# Altium PCB FFT_Device.PcbDoc
Units mm, origin at the board's own origin, x right, y up, seen from the top; angles counter-clockwise.
Board outline 127.36 x 101.63 mm, 2 copper layers (Top Layer, Bottom Layer); 86 components, 96 nets, 384 pads, 101 vias.
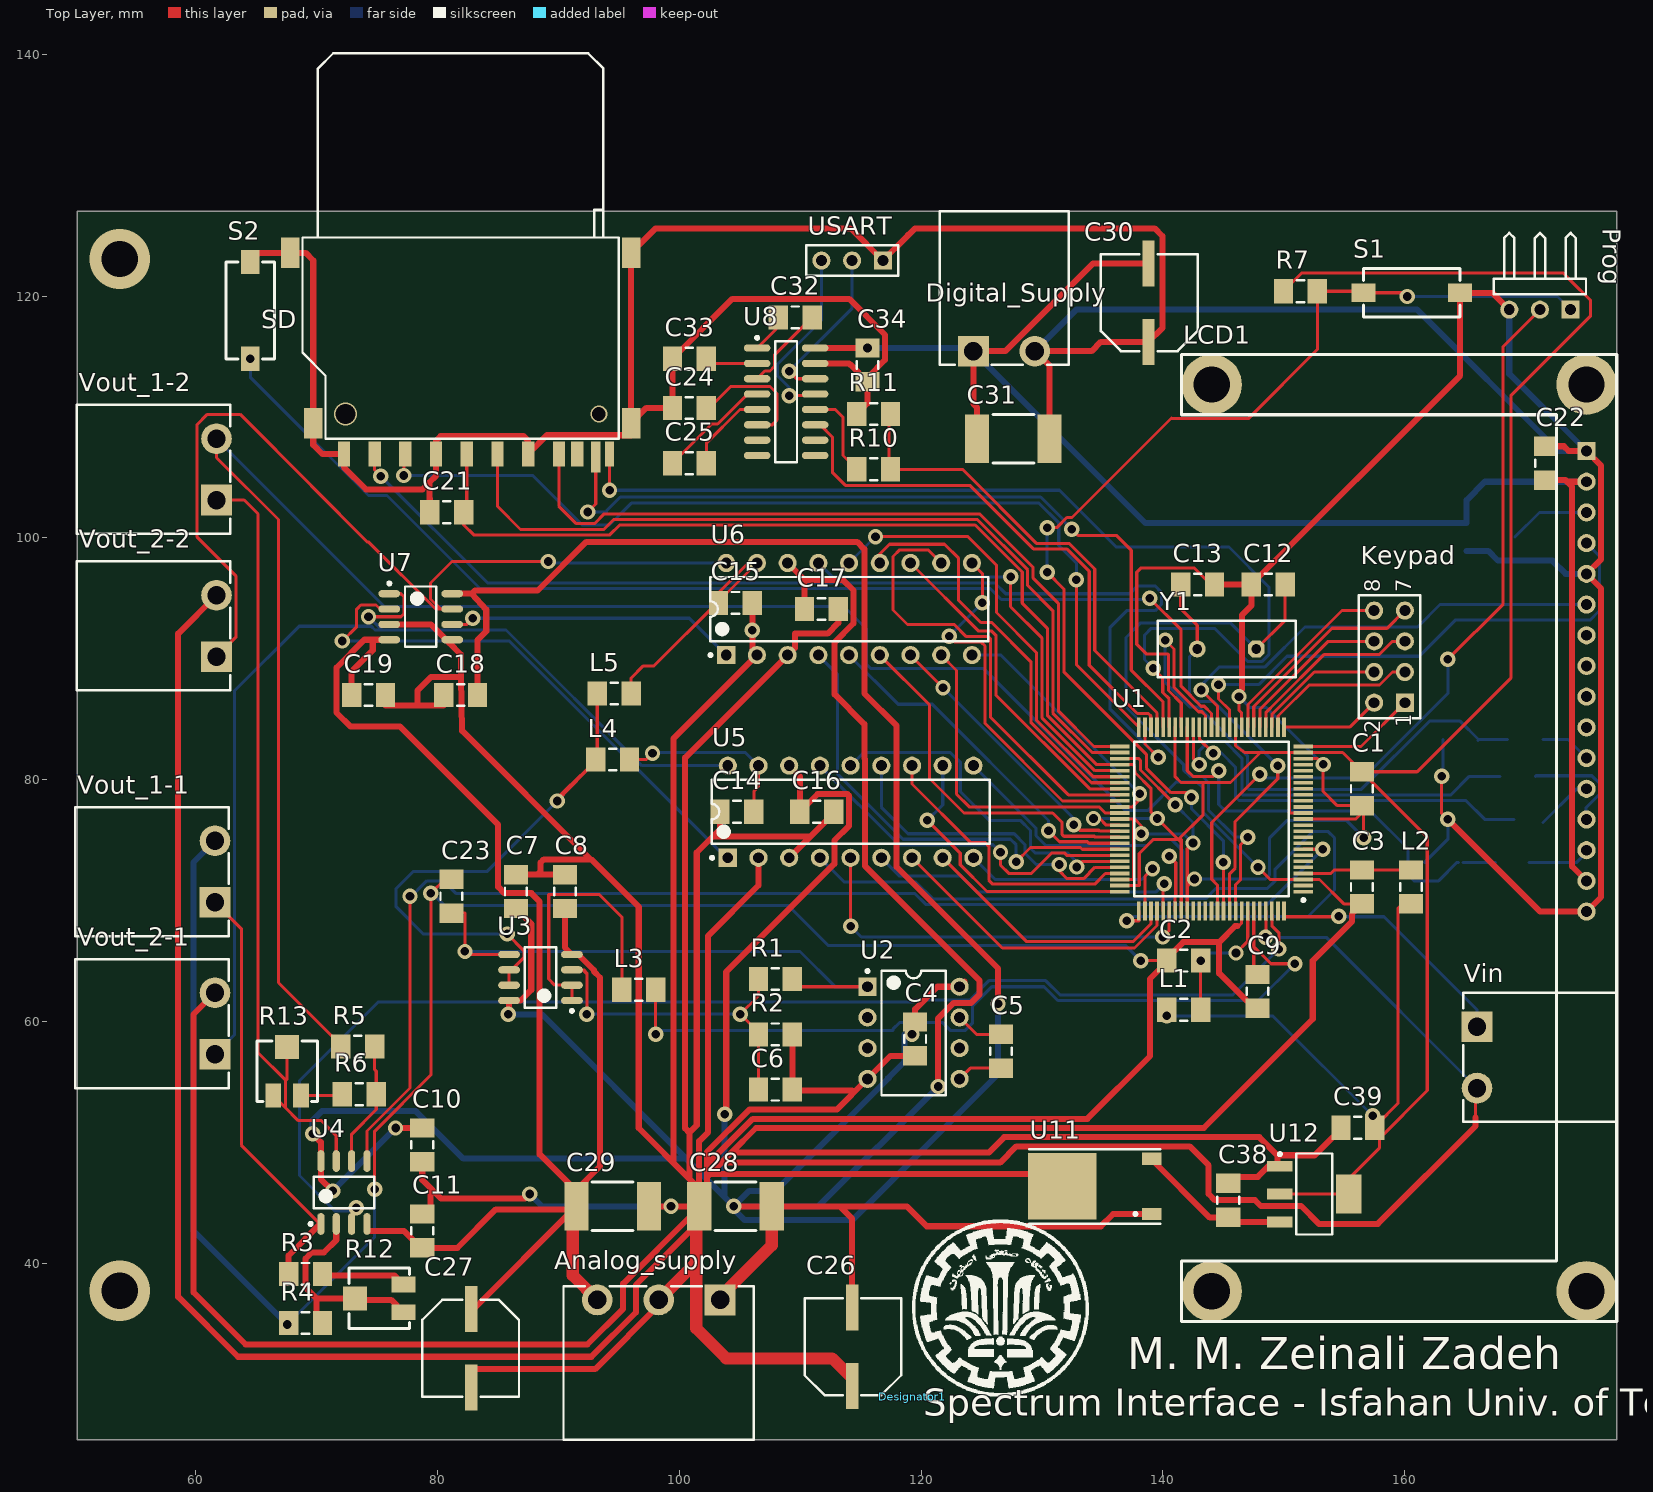
[diagram p0: Top Layer view]
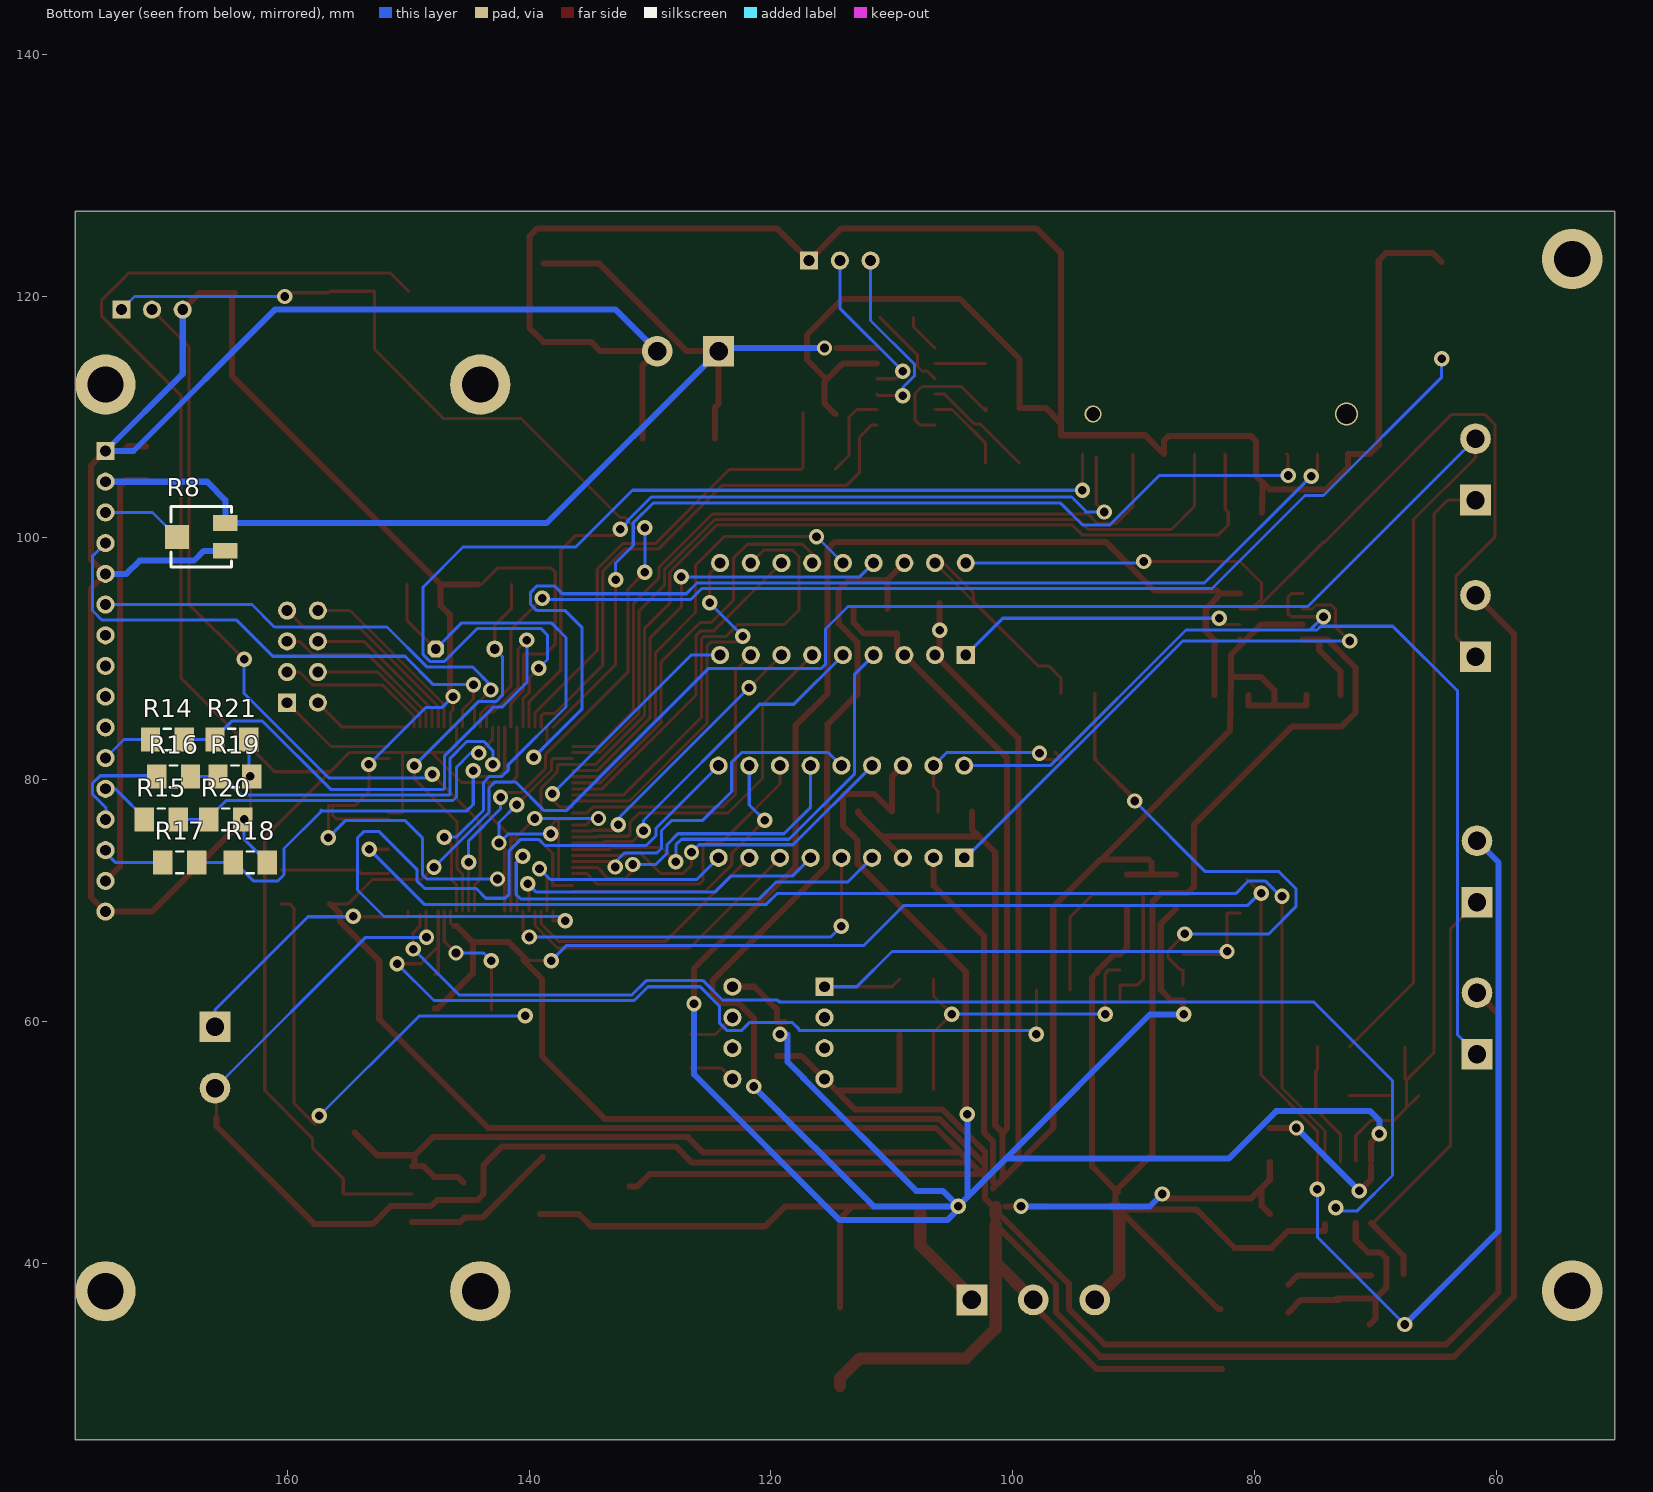
[diagram p1: Bottom Layer view, seen from below]

## Layer stack, top to bottom
Top Layer: signal copper 0.0356
Dielectric: dielectric 0.32, FR-4, Dk 4.8
Bottom Layer: signal copper 0.0356

## Board outline
106.096,25.375 50.19,25.375 50.19,126.898 50.19,127 147.422,127 177.546,127 177.546,36.678 177.546,25.375 106.121,25.375

## Design rules (kind name [scope] priority, off if disabled: settings)
Clearance [All] p1: gap=0.2
ComponentClearance [All] p1: gap=0 collisioncheckmode=3 verticalgap=0 showdistances=FALSE
HoleSize [All] p1: absolutevalues=TRUE maxlimit=3 minlimit=0.025 maxpercent=80.000 minpercent=20.000
MinimumSolderMaskSliver [All] p1: minsoldermaskwidth=0
PolygonConnect [All] p1: connectstyle=Relief reliefconductorwidth=0.254 reliefentries=4 polygonreliefangle="90 Angle"
RoutingTopology RoutingTopology_Starburst [(InNet('-15V_SRC') OR InNet('+3V3_SRC') OR InNet('+15V_SRC') OR InNet('GND_IN') OR InNet('VREF1') OR InNet('VREF2') OR InNet('VREF3') OR InNet('VREF4') OR InNet('VREF_UNBUF'))] p1: topology=Starburst
RoutingTopology RoutingTopology_Generic [All] p2: topology=Shortest
RoutingVias [All] p1: holewidth=0.711 width=1.27 viastyle="Through Hole" minholewidth=0.711 minwidth=1.27 maxholewidth=0.711 maxwidth=1.27
SilkToSilkClearance [All] p1: silktosilkclearance=0
SilkscreenOverComponentPads [All] p1: minsilkscreentomaskgap=0
SolderMaskExpansion [All] p1: expansion=0.102
Width Width_Generic [All] p1: maxlimit=1 minlimit=0.254 preferedwidth=0.254
22 further rules are at their usual default settings.

## Components (designator, comment, footprint, x,y, rotation, side; value= is the part's Value field where it differs from the comment)
Analog_supply "3-Pin Terrminal" "3-pin Terminal" 90.424,38.1 r0 top
C1 "Cap Semi" MELF-R3216-1206 156.464,79.248 r270 top
C2 "Cap Semi" MELF-R3216-1206 141.732,65.024 r0 top
C3 "Cap Semi" MELF-R3216-1206 156.464,71.12 r90 top
C4 "Cap Semi" MELF-R3216-1206 119.507,58.547 r90 top
C5 "Cap Semi" MELF-R3216-1206 126.619,57.531 r90 top
C6 "Cap Semi" MELF-R3216-1206 107.95,54.356 r180 top
C7 "Cap Semi" MELF-R3216-1206 86.487,70.739 r270 top
C8 "Cap Semi" MELF-R3216-1206 90.551,70.739 r90 top
C9 "Cap Semi" MELF-R3216-1206 147.828,62.484 r270 top
C10 "Cap Semi" MELF-R3216-1206 78.74,49.784 r90 top
C11 "Cap Semi" MELF-R3216-1206 78.74,42.672 r90 top
C12 "Cap Semi" MELF-R3216-1206 148.717,96.139 r180 top
C13 "Cap Semi" MELF-R3216-1206 142.875,96.139 r180 top
C14 "Cap Semi" MELF-R3216-1206 104.775,77.343 r0 top
C15 "Cap Semi" MELF-R3216-1206 104.648,94.615 r180 top
C16 "Cap Semi" MELF-R3216-1206 111.379,77.343 r180 top
C17 "Cap Semi" MELF-R3216-1206 111.76,94.107 r180 top
C18 "Cap Semi" MELF-R3216-1206 81.915,86.995 r180 top
C19 "Cap Semi" MELF-R3216-1206 74.295,86.995 r0 top
C21 "Cap Semi" MELF-R3216-1206 80.772,102.108 r0 top
C22 "Cap Semi" MELF-R3216-1206 171.704,106.172 r90 top
C23 "Cap Semi" MELF-R3216-1206 81.153,70.358 r270 top
C24 "Cap Semi" MELF-R3216-1206 100.838,110.744 r180 top
C25 "Cap Semi" MELF-R3216-1206 100.838,106.172 r180 top
C26 "100uF" "Cap Pole-100u" 118.364,37.084 r180 top
C27 "100uF" "Cap Pole-100u" 78.74,28.956 r0 top
C28 "Cap Semi" CAPTANT100u 104.648,44.704 r0 top
C29 "Cap Semi" CAPTANT100u 94.488,44.704 r0 top
C30 "100uF" "Cap Pole-100u" 142.875,123.444 r180 top
C31 "Cap Semi" CAPTANT100u 127.635,108.204 r180 top
C32 "Cap Semi" MELF-R3216-1206 109.601,118.237 r180 top
C33 "Cap Semi" MELF-R3216-1206 100.838,114.808 r0 top
C34 "Cap Semi" MELF-R3216-1206 115.57,114.3 r270 top
C38 "Cap Semi" MELF-R3216-1206 145.415,45.212 r270 top
C39 "Cap Semi" MELF-R3216-1206 156.134,51.206 r0 top
Designator1 "Comment" ? 119.253,28.956 r0 top
Digital_Supply "2-Pin Terminal" "2-pin Terminal" 132.207,114.3 r180 top
Keypad "Header 4X2" HDR2X4 160.02,86.36 r90 top
L1 "Inductor" MELF-R3216-1206 141.732,60.96 r180 top
L2 "Inductor" MELF-R3216-1206 160.528,71.12 r270 top
L3 "Inductor" MELF-R3216-1206 96.647,62.611 r180 top
L4 "Inductor" MELF-R3216-1206 94.488,81.661 r180 top
L5 "Inductor" MELF-R3216-1206 94.615,87.122 r180 top
LCD1 "Charcter LCD16x2" LCD16x2 177.546,35.179 r90 top
Prog "Header 3H" HDR1X3H 173.736,118.872 r180 top
R1 "Res3" MELF-R3216-1206 107.95,63.5 r180 top
R2 "Res3" MELF-R3216-1206 107.95,58.928 r0 top
R3 "Res3" MELF-R3216-1206 69.088,39.116 r180 top
R4 "Res3" MELF-R3216-1206 69.088,35.052 r0 top
R5 "Res3" MELF-R3216-1206 73.406,57.912 r0 top
R6 "Res3" MELF-R3216-1206 73.533,53.975 r180 top
R7 "Res3" MELF-R3216-1206 151.384,120.396 r0 top
R8 "10K" POT4MM-2 167.132,100.076 r0 bottom
R10 "Res3" MELF-R3216-1206 116.078,105.664 r0 top
R11 "Res3" MELF-R3216-1206 116.078,110.236 r0 top
R12 "10K" POT4MM-2 75.184,37.084 r180 top
R13 "10K" POT4MM-2 67.564,55.88 r90 top
R14 "Res3" MELF-R3216-1206 169.926,83.312 r0 bottom
R15 "Res3" MELF-R3216-1206 170.434,76.708 r0 bottom
R16 "Res3" MELF-R3216-1206 169.418,80.264 r0 bottom
R17 "Res3" MELF-R3216-1206 168.91,73.152 r0 bottom
R18 "Res3" MELF-R3216-1206 163.068,73.152 r0 bottom
R19 "Res3" MELF-R3216-1206 164.338,80.264 r0 bottom
R20 "Res3" MELF-R3216-1206 165.1,76.708 r0 bottom
R21 "Res3" MELF-R3216-1206 164.592,83.312 r0 bottom
S1 "Reset" SMD_Switch 156.591,120.269 r90 top
S2 "FCN" SMD_Switch 64.516,114.808 r180 top
SD "SD-Card" SD-Card-Socket 94.996,108.204 r180 top
U1 "ATxmegaA1" TQFP100 144.018,76.708 r180 top
U2 "AD584JN" N-8 119.38,59.055 r0 top
U3 "AD826AR" R-8D_N 88.519,63.627 r180 top
U4 "AD826AR" R-8D_N 72.263,45.847 r90 top
U5 "DAC" DIP-18/D23 114.173,77.343 r90 top
U6 "DAC" DIP-18/D23 114.046,94.107 r90 top
U7 "AD826AR" R-8D_N 78.613,93.472 r0 top
U8 "MAX232ACSE" NSO16_N 108.839,111.252 r0 top
U11 "MC78M12ACDT" 369A-13 135.382,46.355 r90 top
U12 "LM1117IMP-3.3" MP04A_L 152.527,45.72 r0 top
USART "Header 3" HDR1X3 116.84,122.936 r180 top
Vin "2-Pin Terminal" "2-pin Terminal" 164.846,51.689 r90 top
Vout_1-1 "2-Pin Terminal" "2-pin Terminal" 62.738,77.724 r270 top
Vout_1-2 "2-Pin Terminal" "2-pin Terminal" 62.865,110.998 r270 top
Vout_2-1 "2-Pin Terminal" "2-pin Terminal" 62.738,65.151 r270 top
Vout_2-2 "2-Pin Terminal" "2-pin Terminal" 62.865,98.044 r270 top
Y1 "16MHz" HC-49U 145.288,90.805 r180 top

## Footprints (in the part's own frame and the unit in brackets; to place one, negate y for a bottom-side part, rotate by r counter-clockwise, add the part's x,y. Pads: shape width x height; smd on the part's side, far side on the other; paste and mask are expansions set on the pad)
"2-pin Terminal" [mil]
  rect 100x100 hole 60: 1(310,-45)
  round 100 hole 60: 2(110,-45)
  silkscreen extent 0,-500 420,0
"3-pin Terminal" [mil]
  rect 100x100 hole 60: 1(510,-45)
  round 100 hole 60: 2(310,-45) 3(110,-45)
  silkscreen extent 0,-500 620,0
369A-13 [mm] "D-PAK/TO-252-AA; 3 Leads (1 Cropped); Body 10.3 (inc. leads) x 6.7 mm (LxW max)"
  rect 1x1.6 smd: 1(-2.285,-3.7) 3(2.285,-3.7)
  rect 5.5x5.7 smd: 4(0,3.7)
  silkscreen extent -3.08,-4.4 3.08,6.45
"Cap Pole-100u" [mil]
  rect 40x150 smd: 1(160,30) 2(160,285)
  silkscreen extent 0,0 315,315
CAPTANT100u [mm]
  rect 2x4 smd: 1(-3,0) 2(3,0)
  silkscreen extent -1.7,-2 1.7,2
DIP-18/D23 [mm] "DIP, 18-Pin, Row Spacing 7.62 mm, Pitch 2.54 mm"
  rect 1.5x1.5 hole 0.9: 1(-3.81,10.16)
  round 1.5 hole 0.9: 2(-3.81,7.62) 3(-3.81,5.08) 4(-3.81,2.54) 5(-3.81,0) 6(-3.81,-2.54) 7(-3.81,-5.08) 8(-3.81,-7.62) 9(-3.81,-10.16) 10(3.81,-10.16) 11(3.81,-7.62) 12(3.81,-5.08) 13(3.81,-2.54) 14(3.81,0) 15(3.81,2.54) 16(3.81,5.08) 17(3.81,7.62) 18(3.81,10.16)
  silkscreen extent -3.93,-11.5 2.65,11.58, body extent -3.25,-11.5 3.25,11.5, height 4.56
HC-49U [mm] "Quartz Crystal, Thru-Hole; 2 Leads; Body 11.35 x 4.65 x 13.46 mm (LxWxH max)"
  oct 1.4x1.4 hole 0.8: 1(-2.44,0)
  round 1.4 hole 0.8: 2(2.44,0)
  silkscreen extent -5.7,-2.35 5.7,2.35
HDR1X3 [mm] "Connector; Header; 3 Position"
  rect 1.5x1.5 hole 0.9: 1(0,0)
  round 1.5 hole 0.9: 2(2.54,0) 3(5.08,0)
  silkscreen extent -1.27,-1.27 6.35,1.27
HDR1X3H [mm] "Connector; Header; 3 Position; Right Angle"
  rect 1.5x1.5 hole 0.9: 1(0,0)
  round 1.5 hole 0.9: 2(2.54,0) 3(5.08,0)
  silkscreen extent -1.27,-6.35 6.35,-1.27
HDR2X4 [mm] "Connector; Header; 4x2 Position"
  rect 1.5x1.5 hole 0.9: 1(0,0)
  round 1.5 hole 0.9: 2(0,2.54) 3(2.54,0) 4(2.54,2.54) 5(5.08,0) 6(5.08,2.54) 7(7.62,0) 8(7.62,2.54)
  silkscreen extent -1.27,-1.27 8.89,3.81
LCD16x2 [mm]
  rect 1.5x1.5 hole 0.9: 1(72,2.5)
  round 1.5 hole 0.9: 2(69.46,2.5) 3(66.92,2.5) 4(64.38,2.5) 5(61.84,2.5) 6(59.3,2.5) 7(56.76,2.5) 8(54.22,2.5) 9(51.68,2.5) 10(49.14,2.5) 11(46.6,2.5) 12(44.06,2.5) 13(41.52,2.5) 14(38.98,2.5) 15(36.44,2.5) 16(33.9,2.5)
  round 5 hole 3: 17(2.5,33.5) 18(2.5,2.5) 19(77.5,2.5) 20(77.5,33.5)
  silkscreen extent 0,0 80,36
MELF-R3216-1206 [mm] "Metal Electrode Face (MELF) Resistor; Body 3.2 x 1.8 mm (LxDia)"
  rect 1.6x2 smd: 1(-1.4,0) 2(1.4,0)
  silkscreen extent -0.3,-0.9 0.3,0.9
MP04A_L [mm] "SOT223, 4-Leads, Body 6.5x3.5mm, Pitch 2.3mm, Lead Span 7mm, IPC High Density"
  rect 2.1x0.9 smd: 1(-2.85,2.3) 2(-2.85,0) 3(-2.85,-2.3)
  rect 2.1x3.2 smd: 4(2.85,0)
  silkscreen extent -2.97,-3.35 1.5,3.42, body extent -1.85,-3.35 1.85,3.35, height 1.8
N-8 [mm] "DIP, 8-Leads, Row Spacing 7.62mm, Pitch 2.54mm, Body 9.38x6.35mm"
  rect 1.5x1.5 hole 0.9: 1(-3.81,3.81)
  round 1.5 hole 0.9: 2(-3.81,1.27) 3(-3.81,-1.27) 4(-3.81,-3.81) 5(3.81,-3.81) 6(3.81,-1.27) 7(3.81,1.27) 8(3.81,3.81)
  silkscreen extent -3.93,-5.15 2.65,5.23, body extent -3.6,-5.15 3.6,5.15, height 4.44
NSO16_N [mm] "SOIC, 16-Leads, Body 9.9x3.9mm, Pitch 1.27mm, IPC Medium Density"
  oval 2.2x0.6 smd: 1(-2.4,4.445) 2(-2.4,3.175) 3(-2.4,1.905) 4(-2.4,0.635) 5(-2.4,-0.635) 6(-2.4,-1.905) 7(-2.4,-3.175) 8(-2.4,-4.445) 9(2.4,-4.445) 10(2.4,-3.175) 11(2.4,-1.905) 12(2.4,-0.635) 13(2.4,0.635) 14(2.4,1.905) 15(2.4,3.175) 16(2.4,4.445)
  silkscreen extent -2.52,-5 0.9,5.42, body extent -2,-5 2,5, height 1.75
POT4MM-2 [mm] "Square Trimming Potentiometer"
  rect 2x1.3 smd: CCW(-2,-1.15) CW(-2,1.15)
  rect 2x2 smd: W(2,0)
  silkscreen extent -2.5,-2.5 2.5,2.5
R-8D_N [mm] "SOIC, 8-Leads, Body 4.9x3.9mm, Pitch 1.27mm, IPC Medium Density"
  oval 1.8x0.6 smd: 1(-2.6,1.905) 2(-2.6,0.635) 3(-2.6,-0.635) 4(-2.6,-1.905) 5(2.6,-1.905) 6(2.6,-0.635) 7(2.6,0.635) 8(2.6,1.905)
  silkscreen extent -2.73,-2.5 1.3,2.88, body extent -2,-2.5 2,2.5, height 2.59
SD-Card-Socket [mil]
  rect 40x80 smd: 1(795,50) 2(695,50) 3(595,50) 4(495,50) 5(395,50) 6(295,50) 7(195,50) 8(135,50) 9(895,50)
  rect 30x100 smd: 10(75,60)
  rect 30x80 smd: 11(30,50)
  rect 60x100 smd: 12(-40,-50) 13(995,-50) 14(1070,-605) 15(-40,-605)
  silkscreen extent 0,-1255 1030,0
SMD_Switch [mm]
  rect 1.5x2 smd: 1(0,0) 2(0,-8)
  silkscreen extent -2,-8 2,0
TQFP100 [mm]
  rect 1.6x0.3 smd: 1(-7.604,5.971) 2(-7.604,5.471) 3(-7.604,4.971) 4(-7.604,4.471) 5(-7.604,3.971) 6(-7.604,3.471) 7(-7.604,2.971) 8(-7.604,2.471) 9(-7.604,1.971) 10(-7.604,1.471) 11(-7.604,0.971) 12(-7.604,0.471) 13(-7.604,-0.029) 14(-7.604,-0.529) 15(-7.604,-1.029) 16(-7.604,-1.529) 17(-7.604,-2.029) 18(-7.604,-2.529) 19(-7.604,-3.029) 20(-7.604,-3.529) 21(-7.604,-4.029) 22(-7.604,-4.529) 23(-7.604,-5.029) 24(-7.604,-5.529) 25(-7.604,-6.029) 51(7.596,-6.029) 52(7.596,-5.529) 53(7.596,-5.029) 54(7.596,-4.529) 55(7.596,-4.029) 56(7.596,-3.529) 57(7.596,-3.029) 58(7.596,-2.529) 59(7.596,-2.029) 60(7.596,-1.529) 61(7.596,-1.029) 62(7.596,-0.529) 63(7.596,-0.029) 64(7.596,0.471) 65(7.596,0.971) 66(7.596,1.471) 67(7.596,1.971) 68(7.596,2.471) 69(7.596,2.971) 70(7.596,3.471) 71(7.596,3.971) 72(7.596,4.471) 73(7.596,4.971) 74(7.596,5.471) 75(7.596,5.971)
  rect 0.3x1.6 smd: 26(-6.004,-7.629) 27(-5.504,-7.629) 28(-5.004,-7.629) 29(-4.504,-7.629) 30(-4.004,-7.629) 31(-3.504,-7.629) 32(-3.004,-7.629) 33(-2.504,-7.629) 34(-2.004,-7.629) 35(-1.504,-7.629) 36(-1.004,-7.629) 37(-0.504,-7.629) 38(-0.004,-7.629) 39(0.496,-7.629) 40(0.996,-7.629) 41(1.496,-7.629) 42(1.996,-7.629) 43(2.496,-7.629) 44(2.996,-7.629) 45(3.496,-7.629) 46(3.996,-7.629) 47(4.496,-7.629) 48(4.996,-7.629) 49(5.496,-7.629) 50(5.996,-7.629) 76(5.996,7.571) 77(5.496,7.571) 78(4.996,7.571) 79(4.496,7.571) 80(3.996,7.571) 81(3.496,7.571) 82(2.996,7.571) 83(2.496,7.571) 84(1.996,7.571) 85(1.496,7.571) 86(0.996,7.571) 87(0.496,7.571) 88(-0.004,7.571) 89(-0.504,7.571) 90(-1.004,7.571) 91(-1.504,7.571) 92(-2.004,7.571) 93(-2.504,7.571) 94(-3.004,7.571) 95(-3.504,7.571) 96(-4.004,7.571) 97(-4.504,7.571) 98(-5.004,7.571) 99(-5.504,7.571) 100(-6.004,7.571)
  silkscreen extent -7.73,-6.43 6.4,6.8
? [mm]
  silkscreen extent 0,0 14.63,14.63

## Part data
C1 C2 C3 C4 C5 C6 C7 C8 C9 C10 C11 C12 C13 C14 C15 C16 C17 C18 C19 C21 C22 C23 C24 C25 C28 C29 C31 C32 C33 C34 C38 C39: "Capacitor (Semiconductor SIM Model)"
C26 C27 C30: library part "Cap Pole"
Keypad: "Header, 4-Pin, Dual row"
LCD1: library part LCD16x2
Prog: "Header, 3-Pin, Right Angle"
R1 R2 R3 R4 R5 R6 R7 R10 R11 R14 R15 R16 R17 R18 R19 R20 R21: "Resistor"
R8 R12 R13: library part "RPot SM", "Square Trimming Potentiometer"
S1 S2: library part SW-PB, "Switch"
U1: library part ATxMega_A1, "High Performance 8/16bit MCU"
U2: "10V, 7.5V, 5V, 2.5V Pin Programmable Precision Voltage Reference"
U3 U4 U7: "High-Speed, Low-Power Dual Operational Amplifier"
U5 U6: library part AD7541
U8: "+5V Powered, Multi-Channel RS-232 Driver/Receiver"
U11: "Three-Terminal Medium Current Positive Voltage Regulator"
U12: "800mA Low-Dropout Linear Regulator"
USART: "Header, 3-Pin"
Y1: library part ECS-10-13-1, "Crystal Oscillator"

## Via types
v1: diameter 1.27, hole 0.711, Top Layer to Bottom Layer, 97 vias
v2: diameter 5, hole 3, Top Layer to Bottom Layer, 2 vias
v3: diameter 1.905, hole 1.651, Top Layer to Bottom Layer, 1 vias
v4: diameter 1.397, hole 1.143, Top Layer to Bottom Layer, 1 vias

## Nets (pads, with @x,y where several pads share a name; then routed paths per layer and width w, separated by ;. In a path a pad name is that pad's centre, name@x,y a point inside that pad or via, vN(x,y) a via of type N, cw(c..) or ccw(c..) an arc to the next point about the centre after c; other vN are vias at no path point)
+3V3: C1.1 C21.2 C39.2 L1.2 L2.2 R7.1 SD.4 U1.14 U1.24 U1.34 U1.44 U1.54 U1.64 U1.74 U1.83 U12.2 U12.4 | length 310.4
  Top Layer w0.254: SD.4 82.423,102.359 C21.2 82.172,101.064 82.995,100.241 94.249,100.241 95.071,101.063 124.471,101.063 128.368,97.166 128.368,94.59 130.449,92.509 130.449,85.31 134.522,81.237 U1.54 137.603,81.237 137.7,80.585 139.036,79.248 139.036,77.289 v1@139.544,76.781 ; v1(134.264,76.784) 134.772,76.784 135.32,76.237 U1.64 ; U1.74 138.049,71.237 138.049,73.889 139.192,75.032 141.294,75.032 ; v1(139.548,76.784) v1@139.544,76.781 ; U1.44 141.022,80.238 141.504,79.756 143.332,79.756 ; U1.83 U1.83@141.522,69.875 ; U1.34 146.022,82.804 146.812,82.237 148.074,82.237 ; U12.2 U12.4 155.377,46.99 157.937,49.55 157.937,50.343 161.874,54.28 161.874,75.238 C1.1 ; R7.1 151.508,121.92 173.101,121.92 173.789,121.232 ; U1.14 150.495,77.237 150.495,82.237 ; C39.2@157.683,51.46 159.436,53.213 159.436,69.339 159.817,69.72 L2.2 ; 173.66,121.361 173.789,121.232 ; v1@139.544,76.781 141.284,75.041 ; 141.284,75.041 143.332,77.089 143.332,79.756 ; 141.284,75.041 141.294,75.032 ; 141.294,75.032 141.522,74.803 ; 141.294,75.032 141.529,75.032 141.529,74.803 ; U1.83@141.522,69.875 141.529,69.875 141.529,74.803 ; U1.83@141.522,69.875 141.522,69.949 141.522,74.803 ; 141.522,74.803 141.529,74.803 ; 143.332,79.756 145.593,79.756 148.074,82.237 ; 148.074,82.237 150.495,82.237 ; 150.495,82.237 U1.24 154.875,82.237 C1.1 ; C1.1 161.039,80.648 168.783,88.392 168.783,111.76 175.387,118.364 175.387,119.634 173.789,121.232
  Bottom Layer w0.254: v1(134.264,76.784) v1(139.548,76.784) ; v1(140.335,60.452) 149.098,60.452 v1@157.505,52.045
  other v1: 157.378,52.197
+5V: C22.1 C30.1 C31.2 C34.1 Digital_Supply.1 LCD1.2 LCD1.15 R8.CCW U8.16 | length 133.4
  Top Layer w0.5: U8.16 114.557,115.697 ; C34.1@115.319,115.821 C34.1@115.443,115.697 ; C31.2 124.635,110.769 124.333,111.071 Digital_Supply.1 126.975,115.443 134.214,122.682 C30.1 ; C22.1 171.729,104.772 173.304,104.772 173.437,104.639 ; LCD1.15 173.846,72.819 173.846,74.673 173.863,74.69 173.863,76.185 173.846,76.202 173.846,104.23 173.437,104.639 ; LCD1.2 173.437,104.639
  Bottom Layer w0.5: v1(115.57,115.7) 124.076,115.7 Digital_Supply.1 138.55,101.226 R8.CCW@165.125,101.226 ; R8.CCW R8.CCW@165.125,101.226 ; LCD1.2 166.64,104.639 165.125,103.124 R8.CCW@165.125,101.226
+15V: Analog_supply.1 C4.2 C7.2 C10.2 C16.2 C17.2 C18.1 C26.1 C28.2 U2.8 U3.8 U4.8 U5.16 U6.16 U7.8 U11.1 | length 413.1
  Top Layer w0.5: v1(69.672,50.698) 70.358,50.013 U4.8 ; U4.8@70.358,48.057 70.358,46.939 v1(71.323,45.974) ; v1(76.533,51.184) C10.2 ; U7.8 82.835,95.377 ; C18.1 83.315,91.553 84.033,92.271 84.033,94.052 82.835,95.377 ; v1@85.919,60.579 U3.8 86.868,61.722 87.757,62.611 87.757,68.069 C7.2 ; Analog_supply.1 Analog_supply.1@103.378,37.211 ; v1(103.759,52.324) 103.886,52.451 103.886,64.089 112.833,73.036 112.833,74.961 114.029,76.157 114.029,78.683 113.919,78.793 111.432,78.793 109.982,77.343 C16.2 109.979,80.267 U5.16 ; v1(104.521,44.704) C28.2 113.284,44.704 ; U6.16 110.36,96.523 ; C17.2 110.36,96.523 ; C26.1 114.3,43.688 113.284,44.704 ; C4.2@118.85,59.947 C4.2 119.507,61.011 121.361,62.865 U2.8 U2.8@123.602,63.277 ; v1(121.412,54.61) 121.412,60.244 122.693,61.525 124.136,61.525 124.841,62.23 124.841,63.373 115.373,72.841 115.373,81.707 115.316,81.764 115.316,84.582 112.846,87.052 112.846,91.357 114.41,92.921 114.41,95.648 113.535,96.523 110.36,96.523 ; v1(126.365,61.468) 126.365,64.389 117.983,72.771 117.983,84.455 115.316,87.122 115.316,99.06 114.712,99.664 92.308,99.664 88.275,95.631 83.089,95.631 82.835,95.377 ; U11.1 135.89,44.07 134.873,43.053 120.472,43.053 118.821,44.704 113.284,44.704
  Top Layer w1: Analog_supply.1@102.997,36.83 103.378,37.211 107.648,41.481 C28.2@107.648,44.196
  Bottom Layer w0.5: v1(69.672,50.698) 69.672,51.816 70.434,52.578 78.207,52.578 82.144,48.641 100.584,48.641 ; v1(71.323,45.974) v1(76.533,51.184) ; v1@85.919,60.579 88.646,60.579 100.584,48.641 ; v1(103.759,52.324) 103.759,45.466 ; 117.221,55.245 117.348,55.372 ; v1(119.253,58.928) 118.618,58.928 118.618,56.642 117.348,55.372 ; v1(121.412,54.61) 111.506,44.704 v1(104.521,44.704) ; v1(126.365,61.468) 126.365,55.626 114.3,43.561 105.41,43.561 104.521,44.45 v1(104.521,44.704) ; 100.584,48.641 103.759,45.466 ; 103.759,45.466 v1(104.521,44.704) ; v1(104.521,44.704) 105.791,45.974 107.996,45.974 117.348,55.326 117.348,55.372
  other v1: 85.852,60.579
-15V: Analog_supply.3 C8.1 C11.1 C19.1 C27.2 C29.1 U3.4 U4.4 U7.4 | length 133.1
  Top Layer w0.5: C19.1 72.895,88.948 74.645,90.698 74.645,91.567 ; U4.4@74.168,42.647 77.241,42.647 78.537,41.351 78.537,41.272 C11.1 81.658,41.272 84.836,44.45 C29.1@91.234,44.45 ; U4.4@74.168,42.83 U4.4 ; U7.4 74.645,91.567 ; C27.2 82.979,36.195 C29.1@91.186,44.402 ; C8.1 90.551,66.1 U3.4 91.646,65.532 92.931,64.247 92.931,64.137 93.441,63.627 93.441,56.078 93.441,48 C29.1@91.313,45.872 ; C29.1@91.313,44.679 C29.1@91.313,44.704 ; C29.1@91.516,44.526 91.516,45.949 88.457,49.008 88.457,69.912 87.757,70.612 85.522,70.612 85.014,71.12 85.014,76.276 76.917,84.373 72.816,84.373 71.645,85.545 71.645,89.267 73.945,91.567 74.645,91.567
  Top Layer w1: C29.1 91.234,44.45 91.186,44.402 91.186,38.989 Analog_supply.3
ADC_IN: U1.100 Vin.1 | length 21.3
  Top Layer w0.254: U1.100 150.022,68.656 154.661,68.656 154.61,68.707 v1(154.559,68.707)
  Bottom Layer w0.254: v1(154.559,68.707) 154.61,68.656 158.293,68.656 165.989,60.96 Vin.1
AGND: Analog_supply.2 C2.1 C3.1 C4.1 C6.1 C7.1 C8.2 C9.2 C10.1 C11.2 C14.1 C15.1 C16.1 C17.1 C18.2 C19.2 C23.1 C26.2 C27.1 C28.1 C29.2 C38.1 C39.1 R2.2 R4.1 R5.1 U1.3 U1.93 U1.97 U2.4 U5.2 U5.3 U6.2 U6.3 U7.3 U7.5 U11.4 U12.1 Vin.2 Vout_1-1.2 Vout_1-2.2 Vout_2-1.2 Vout_2-2.2 | length 1188.1
  Top Layer w0.254: Vout_1-2.2 61.722,106.633 66.842,101.513 66.842,63.206 R5.1@72.136,57.912 ; v1@74.803,46.126 74.803,50.92 79.451,55.568 v1(79.451,70.587) C23.1@80.623,71.758 ; v1(138.176,65.024) C2.1 ; 146.256,67.866 146.522,68.132 U1.93 ; v1(147.872,72.746) 148.881,71.737 U1.3 152.756,71.737 152.763,71.73 ; v1(148.488,66.954) 148.522,66.988 U1.97 ; 152.603,71.73 152.763,71.73 ; C3.1 154.974,69.72 152.964,71.73 152.763,71.73 ; 165.862,52.039 165.862,54.356 Vin.2
  Top Layer w0.5: Vout_2-1.2 59.817,60.579 59.817,37.592 64.135,33.274 92.405,33.274 95.352,36.22 95.352,38.303 C28.1@101.117,44.069 ; Vout_2-2.2 58.547,92.075 58.547,37.211 63.5,32.258 92.735,32.258 96.418,35.941 96.418,38.202 101.408,43.191 101.549,43.332 C28.1@101.549,43.967 ; C19.2 75.695,86.137 78.359,86.137 ; U7.3 79.451,92.837 U7.5@80.967,91.321 ; C11.2 79.406,44.738 79.406,46.228 ; C10.1 78.74,46.894 80.295,45.339 87.249,45.339 v1(87.63,45.72) ; C18.2 80.515,86.137 78.359,86.137 ; U7.5 U7.5@80.967,91.321 ; C27.1@82.677,31.242 93.04,31.242 Analog_supply.2@98.527,36.728 ; C7.1 88.237,72.139 ; C8.2 88.237,72.139 ; 92.71,73.406 96.647,69.469 96.647,51.181 100.838,46.99 ; C29.2 v1(99.314,44.704) 100.584,44.704 ; 99.517,48.311 99.517,83.388 U6.2 106.048,90.675 v1(106.048,92.354) C15.1 ; 100.825,50.787 101.448,51.41 101.448,73.968 102.791,75.311 ; C28.1 102.283,45.339 102.283,47.117 ; C28.1@101.648,46.18 100.838,46.99 ; 101.648,46.736 101.648,50.086 102.362,50.8 102.362,67.056 106.553,71.247 U5.2 ; C14.1 103.375,75.895 102.791,75.311 ; U5.3 110.871,75.311 ; R2.2 C6.1 109.35,54.28 114.269,54.28 ; C16.1 112.779,77.219 110.871,75.311 ; C17.1 113.16,92.964 112.271,92.075 109.57,92.075 109.57,90.901 U6.3 100.482,81.813 100.482,51.156 100.838,50.8 100.838,46.99 ; C4.1 117.472,57.147 U2.4 113.03,52.705 105.791,52.705 102.283,49.197 102.283,48.133 ; U11.4 131.064,46.355 130.048,47.371 102.537,47.371 ; C2.1@140.208,65.075 141.681,66.548 144.653,66.548 ; C2.1 C2.1@140.384,64.972 ; C2.1@140.487,65.075 C2.1@140.384,64.972 ; C38.1@145.415,46.66 145.898,47.142 147.853,47.142 148.731,48.02 U12.1 149.479,48.218 149.479,48.926 ; 146.177,67.887 145.992,67.887 144.653,66.548 ; C9.2 147.55,61.084 144.653,63.981 144.653,66.548 ; C39.1@154.429,50.8 152.555,48.926 149.479,48.926 ; C3.1 155.644,68.9 155.644,68.258 152.4,65.014 152.4,60.198 143.383,51.181 106.347,51.181 104.315,49.149 ; 165.862,52.039 165.862,51.339 157.779,43.256 152.908,43.256 151.435,44.729 148.107,44.729 147.625,45.212 144.297,45.212 143.789,45.72 143.789,48.082 142.215,49.657 127.889,49.657 126.546,48.314 103.48,48.314 ; 78.359,86.137 78.359,87.376 79.477,88.494 81.94,88.494 ; U7.5@80.967,91.321 81.94,90.348 81.94,88.494 ; 81.94,88.494 82.042,84.023 92.659,73.406 88.804,73.406 88.519,73.121 88.519,72.421 88.237,72.139 ; Analog_supply.2@98.527,36.728 Analog_supply.2 98.755,36.957 Analog_supply.2@98.527,36.728 ; 102.283,47.117 102.537,47.371 ; 102.283,47.117 102.283,47.371 ; 102.283,47.371 102.283,48.133 ; 102.283,47.371 102.537,47.371 ; 102.283,48.133 106.093,51.943 133.751,51.943 138.935,57.127 138.935,63.523 C2.1@140.384,64.972 ; 102.537,47.371 103.48,48.314 ; 102.791,75.311 110.871,75.311 ; 103.48,48.314 104.315,49.149 ; 104.315,49.149 125.603,49.149 126.873,50.419 147.986,50.419 149.479,48.926
  Top Layer w1: Analog_supply.2 101.408,40.067 ; C28.1@101.408,43.191 101.408,40.067 ; C28.1@101.408,43.967 C28.1@101.408,44.653 ; C26.2 114.3,30.48 112.649,32.131 103.886,32.131 101.408,34.609 101.408,40.067
  Bottom Layer w0.254: Vout_1-2.2 75.608,94.318 113.632,94.318 115.494,92.456 115.494,89.535 115.824,89.205 125.146,89.205 136.919,77.431 138.747,77.431 141.132,79.816 142.815,79.816 143.329,79.302 143.329,77.288 v1(147.872,72.746) ; v1(67.564,34.925) 74.803,42.164 v1(74.803,46.101) ; v1(79.451,70.587) 79.578,70.587 80.594,69.571 109.042,69.571 112.344,66.269 136.931,66.269 v1(138.176,65.024) ; v1(148.488,66.954) 153.518,66.954 Vin.2
  Bottom Layer w0.5: Vout_1-1.2 59.817,73.152 59.817,42.672 v1(67.564,34.925) ; v1(87.63,45.72) 88.646,44.704 v1(99.314,44.704)
DGND: C1.2 C12.2 C13.1 C21.1 C22.2 C24.2 C30.2 C31.1 C33.1 C34.2 Digital_Supply.2 LCD1.1 LCD1.5 LCD1.16 Prog.3 R8.CW R11.1 R18.1 R19.1 R20.1 R21.1 S1.2 S2.2 SD.3 SD.6 SD.9 SD.12 SD.13 SD.14 SD.15 U1.13 U1.23 U1.33 U1.43 U1.53 U1.63 U1.73 U1.84 U8.15 USART.1 | length 481.3
  Top Layer w0.254: U1.73 137.566,71.737 137.566,76.737 ; U1.63 137.566,76.737 ; U1.53 138.011,81.737 138.154,81.594 138.154,80.788 v1(141.018,77.924) ; v1(138.201,75.507) 138.201,76.203 137.668,76.737 137.566,76.737 ; U1.43 141.522,86.323 140.474,87.371 140.474,90.335 140.436,90.373 138.666,90.373 137.841,91.198 137.841,97.15 138.176,97.485 142.621,97.485 143.967,96.139 C13.1 ; U1.84 142.022,71.182 ; v1(142.494,74.752) 142.022,74.28 142.022,71.182 ; v1(142.621,71.78) 142.022,71.182 ; v1@146.304,86.518 146.304,85.73 146.522,85.511 U1.33 ; U1.23@151.613,81.737 152.781,81.737 v1(153.264,81.255) 153.264,79.016 154.432,77.848 C1.2@156.261,77.848 ; U1.13 152.756,76.737 155.956,76.737 156.261,77.042 C1.2@156.261,77.848 ; v1(156.616,75.184) 156.616,77.848 C1.2 C1.2@156.261,77.848 ; v1(163.068,80.264) 163.068,77.216 v1(163.576,76.708)
  Top Layer w0.5: S2.2 65.279,123.571 SD.14 69.088,123.571 69.723,122.936 SD.13 69.723,107.696 70.485,106.934 SD.9 72.263,105.842 74.107,103.998 78.74,103.998 79.318,104.575 ; C21.1 79.318,104.575 ; U8.15 114.043,114.427 114.172,114.298 C34.2 115.57,111.128 R11.1 ; C34.2@115.57,113.264 117.02,114.714 117.02,116.787 114.046,119.761 104.391,119.761 C33.1 C24.2 97.282,110.744 SD.12 ; 118.999,125.095 118.7,124.796 ; C31.1 130.635,114.221 Digital_Supply.2 134.112,115.443 134.874,116.205 C30.2 139.954,117.348 139.954,124.968 139.319,125.603 119.507,125.603 118.7,124.796 ; C13.1 C12.2 ; 146.558,87.472 146.558,93.627 147.317,94.386 C12.2 ; v1(163.576,76.708) 171.205,69.079 LCD1.16 176.246,70.279 176.246,95.819 LCD1.5 176.251,98.224 176.251,105.974 LCD1.1 173.57,107.179 173.177,107.572 C22.2 ; S1.2@164.338,120.269 S1.2 ; Prog.3 167.259,120.269 S1.2 ; 79.318,104.575 79.883,105.141 SD.3 79.883,108.026 80.264,108.407 87.122,108.407 87.503,108.026 SD.6 89.052,108.483 96.012,108.483 SD.12 ; SD.12 SD.15 98.044,125.603 114.173,125.603 USART.1 118.7,124.796 ; C12.2 164.591,113.413 S1.2
  Bottom Layer w0.254: v1(138.201,75.507) 141.739,75.507 v1(142.494,74.752) 142.494,76.448 v1(141.018,77.924) ; v1(142.621,71.78) 148.478,71.78 148.834,72.136 148.834,75.184 150.281,76.632 155.169,76.632 v1(156.616,75.184) ; v1(146.304,86.868) 147.193,85.979 148.539,85.979 v1(153.264,81.255) ; R18.1 163.576,75.06 R20.1@163.576,76.454 ; v1(163.068,80.264) 163.192,80.388 R21.1
  Bottom Layer w0.5: Digital_Supply.2 132.842,118.872 161.036,118.872 172.729,107.179 LCD1.1 168.656,113.569 Prog.3 ; R8.CW 166.91,98.926 167.723,98.113 172.228,98.113 173.322,97.019 LCD1.5
LCDDATA4: R14.1 R21.2 U1.39 | length 48.9
  Top Layer w0.254: v1(140.196,91.542) 140.928,90.809 140.928,87.63 142.946,85.612 143.216,85.612 143.522,85.306 U1.39
  Bottom Layer w0.254: v1(140.196,91.542) 140.196,88.037 142.24,85.993 142.963,85.993 147.018,81.937 147.018,79.273 147.098,79.194 156.41,79.194 162.052,84.836 164.592,84.836 R21.2@166.116,83.312 ; R21.2@166.054,83.25 R21.2@166.116,83.312 ; R14.1 R21.2@166.116,83.312
LCDDATA5: R15.1 R20.2 U1.40 | length 31.2
  Top Layer w0.254: U1.40 143.022,83.343 v1(144.17,82.194)
  Bottom Layer w0.254: v1(144.17,82.194) 144.851,82.194 146.014,81.032 146.014,78.557 146.304,78.267 165.065,78.267 166.624,76.708 R15.1
LCDDATA6: R16.1 R19.2 U1.41 | length 33.8
  Top Layer w0.254: U1.41 142.522,81.734 v1(143.002,81.255)
  Bottom Layer w0.254: v1(143.002,81.255) 143.002,82.398 143.764,83.16 145.136,83.16 146.564,81.731 146.564,78.761 146.585,78.74 163.83,78.74 165.354,80.264 R19.2 R16.1@167.894,80.264
LCDDATA7: R17.1 R18.2 U1.42 | length 36.5
  Top Layer w0.254: U1.42 142.022,80.742 142.494,80.27 144.177,80.27 v1(144.628,80.721)
  Bottom Layer w0.254: v1(144.628,80.721) 144.628,77.937 145.152,77.413 157.226,77.413 ; 157.226,77.47 157.226,77.413 ; R18.2 164.338,73.152 162.814,71.628 160.782,71.628 160.274,72.136 160.274,74.298 157.226,77.346 157.226,77.413 ; R18.2@164.846,73.152 R17.1
NetC2_2: C2.2 L1.1 U1.94 | length 11.1
  Top Layer w0.254: L1.1 C2.2 ; v1(146.05,65.659) 147.022,66.631 U1.94
  Bottom Layer w0.254: v1(143.129,65.024) 143.764,65.659 v1(146.05,65.659)
NetC3_2: C3.2 L2.1 U1.4 | length 9
  Top Layer w0.254: U1.4 153.899,72.237 154.182,72.52 C3.2 L2.1
NetC5_1: C5.1 U2.5 | length 3.8
  Top Layer w0.254: U2.5 124.076,56.131 C5.1
NetC5_2: C5.2 U2.7 | length 4
  Top Layer w0.254: U2.7 124.584,58.931 C5.2
NetC23_2: C23.2 R1.1 U2.1 U3.5 | length 49.1
  Top Layer w0.254: U3.5 82.525,65.532 v1(82.271,65.786) 82.271,68.958 C23.2@81.204,68.958 ; R1.1@109.347,63.5 109.982,62.865 U2.1 ; C23.2@81.204,68.958 C23.2 C23.2@81.204,68.958
  Bottom Layer w0.254: v1(82.271,65.786) 109.982,65.786 112.903,62.865 U2.1
NetC24_1: C24.1 U8.6 | length 11.2
  Top Layer w0.254: C24.1 102.235,110.741 102.235,110.49 104.259,112.514 107.499,112.514 108.077,111.936 108.077,109.728 107.696,109.347 U8.6
NetC25_1: C25.1 U8.5 | length 7
  Top Layer w0.254: C25.1 102.238,107.826 105.029,110.617 U8.5
NetC25_2: C25.2 U8.4 | length 9.4
  Top Layer w0.254: C25.2 102.683,109.417 103.173,109.417 105.643,111.887 U8.4
NetC32_1: C32.1 U8.3 | length 7.2
  Top Layer w0.254: U8.3 107.082,113.8 107.499,113.8 107.866,114.167 107.866,115.102 C32.1
NetC32_2: C32.2 U8.1 | length 3.3
  Top Layer w0.254: U8.1 108.201,117.459 C32.2
NetC33_2: C33.2 U8.2 | length 4.2
  Top Layer w0.254: C33.2@102.238,114.427 U8.2
NetC38_2: C38.2 U11.3 U12.3 | length 13.1
  Top Layer w0.254: U11.3@139.065,48.59 139.065,48.64 U11.3
  Top Layer w0.5: U11.3@138.887,48.768 139.065,48.59 143.891,43.764 145.339,43.764 145.683,43.42 U12.3
NetKeypad_1: Keypad.1 U1.25 | length 9.9
  Top Layer w0.254: U1.25 156.397,82.737 Keypad.1
NetKeypad_2: Keypad.2 U1.26 | length 8.3
  Top Layer w0.254: U1.26 155.457,84.337 Keypad.2
NetKeypad_3: Keypad.3 U1.27 | length 12.9
  Top Layer w0.254: U1.27 149.522,85.249 149.737,85.464 149.74,85.464 152.099,87.823 157.926,87.823 159.003,88.9 Keypad.3
NetKeypad_4: Keypad.4 U1.28 | length 11
  Top Layer w0.254: U1.28 149.022,85.391 149.549,85.918 149.552,85.918 152.534,88.9 Keypad.4
NetKeypad_5: Keypad.5 U1.29 | length 15.1
  Top Layer w0.254: U1.29 148.522,85.533 149.361,86.372 149.364,86.372 153.355,90.363 157.926,90.363 159.003,91.44 Keypad.5
NetKeypad_6: Keypad.6 U1.30 | length 13.3
  Top Layer w0.254: U1.30 148.022,85.792 153.67,91.44 Keypad.6
NetKeypad_7: Keypad.7 U1.31 | length 17.5
  Top Layer w0.254: U1.31 147.522,86.047 153.992,92.517 158.557,92.517 Keypad.7
NetKeypad_8: Keypad.8 U1.32 | length 15.5
  Top Layer w0.254: U1.32@147.045,84.36 147.045,86.212 154.813,93.98 Keypad.8
NetL3_2: L3.2 U3.1 U3.2 | length 23.2
  Top Layer w0.254: U3.1 U3.2 89.713,62.992 89.205,63.5 89.205,70.485 93.396,70.485 95.247,68.634 L3.2
NetLCD1_3: LCD1.3 R8.W | length 6.8
  Bottom Layer w0.254: R8.W 171.155,102.099 LCD1.3
NetLCD1_4: LCD1.4 U1.35 | length 44
  Top Layer w0.254: v1(144.602,87.859) 144.602,86.67 145.522,85.75 U1.35
  Bottom Layer w0.254: v1(144.602,87.859) 147.93,87.859 150.275,90.204 161.197,90.204 164.186,93.193 175.336,93.193 176.124,93.98 176.124,98.481 LCD1.4
NetLCD1_6: LCD1.6 U1.37 | length 38.7
  Top Layer w0.254: v1(143.18,87.409) 144.522,86.066 U1.37
  Bottom Layer w0.254: v1(143.18,87.409) 143.18,87.814 144.69,89.324 148.463,89.324 151.763,92.624 161.077,92.624 162.932,94.479 LCD1.6
NetLCD1_11: LCD1.11 R14.2 | length 4.2
  Bottom Layer w0.254: R14.2@171.45,83.312 173.513,83.312 LCD1.11
NetLCD1_12: LCD1.12 R15.2 | length 4.7
  Bottom Layer w0.254: R15.2@171.45,76.454 174.235,79.239 LCD1.12
NetLCD1_13: LCD1.13 R16.2 | length 9
  Bottom Layer w0.254: R16.2 170.87,80.316 175.492,80.316 176.123,79.685 176.123,78.793 175.006,77.676 LCD1.13@175.006,76.708
NetLCD1_14: LCD1.14 R17.2 | length 5
  Bottom Layer w0.254: R17.2 174.244,73.152 LCD1.14@175.006,73.914
NetR3_1: R3.1 R12.CCW | length 7.1
  Top Layer w0.5: R3.1@70.358,38.989 76.429,38.989 R12.CCW
NetR4_2: R4.2 R12.CW R12.W U4.2 | length 18.4
  Top Layer w0.5: R4.2@70.485,34.925 69.977,35.433 69.977,37.084 ; U4.2@71.628,43.307 U4.2 71.628,41.91 70.612,40.894 69.596,40.894 69.088,40.386 69.088,37.973 69.977,37.084 ; R12.W@73.025,36.957 76.161,36.957 R12.CW ; R12.W 69.977,37.084
NetR5_2: R5.2 R6.1 U4.6 | length 10.4
  Top Layer w0.254: U4.6@72.898,48.387 U4.6 72.898,50.673 74.933,52.708 R6.1 74.933,55.88 74.806,56.007 R5.2
NetR6_2: R6.2 R13.CCW | length 3.4
  Top Layer w0.254: R13.CCW 72.104,53.88 R6.2@72.136,53.848
NetR10_1: R10.1 U8.12 | length 7.4
  Top Layer w0.254: U8.12 112.903,110.617 113.538,109.982 113.538,106.804 R10.1
NetS2_1: S2.1 U1.38 | length 96.5
  Top Layer w0.254: v1(138.904,95.005) 141.517,92.391 141.517,87.711 143.162,86.066 143.427,86.066 144.022,85.471 U1.38
  Bottom Layer w0.254: v1(64.516,114.808) 64.516,113.284 74.295,103.505 75.819,103.505 83.518,95.806 125.73,95.806 126.644,94.891 138.79,94.891 v1(138.904,95.005)
NetSD_1: SD.1 U1.49 | length 92.5
  Top Layer w0.254: SD.1 74.803,105.613 v1(75.311,105.105) ; U1.49 138.522,82.94 v1(139.624,81.839)
  Bottom Layer w0.254: v1(75.311,105.105) 84.157,96.26 89.24,96.26 126.11,96.26 127,95.37 137.255,95.37 137.897,96.012 139.37,96.012 139.878,95.504 139.878,94.488 139.363,93.974 137.014,93.974 135.642,92.602 135.642,85.82 v1(139.624,81.839)
NetSD_2: SD.2 U1.50 | length 79
  Top Layer w0.254: v1@77.343,105.283 v1(77.216,105.156) 77.216,106.807 SD.2 ; v1(132.842,96.52) 132.842,89.517 U1.50
  Bottom Layer w0.254: v1(77.216,105.156) 87.884,105.156 91.977,101.063 94.234,101.063 96.041,102.87 129.757,102.87 131.391,101.236 131.391,99.368 132.842,97.917 v1(132.842,96.52)
NetSD_5: SD.5 U1.52 | length 70.6
  Top Layer w0.254: SD.5 84.963,102.6 86.868,100.695 93.754,100.695 94.577,101.517 123.698,101.517 123.836,101.517 124.659,101.517 128.822,97.354 128.822,96.057 130.903,93.976 130.903,85.498 134.164,82.237 U1.52
NetSD_7: SD.7 U1.51 | length 65.3
  Top Layer w0.254: SD.7 90.043,102.616 91.491,101.168 92.983,101.168 93.796,101.981 124.838,101.981 129.276,97.542 129.276,96.66 131.357,94.579 131.357,85.686 134.306,82.737 U1.51
NetSD_10: SD.10 U1.46 | length 68
  Top Layer w0.254: v1(92.431,102.133) 93.091,102.794 SD.10 ; v1(132.461,100.711) 132.969,100.203 136.144,100.203 137.387,98.96 137.387,89.054 140.022,86.419 U1.46
  Bottom Layer w0.254: v1(92.431,102.133) 93.98,102.133 93.98,102.235 95.123,103.378 129.892,103.378 131.845,101.425 131.845,101.327 v1(132.461,100.711)
NetSD_11: SD.11 U1.45 | length 86.8
  Top Layer w0.254: v1(94.234,103.937) SD.11 ; v1(139.217,89.205) 139.979,88.443 139.995,87.462 139.995,87.208 140.522,86.681 U1.45
  Bottom Layer w0.254: v1(94.234,103.937) 131.445,103.937 136.144,99.238 145.466,99.238 148.768,95.936 148.768,90.332 148.213,89.778 147.001,89.778 144.272,92.507 139.04,92.507 138.481,91.948 138.481,89.941 v1(139.217,89.205)
NetU1_8: U1.8 U4.5 | length 103.9
  Top Layer w0.254: U4.5@74.168,48.514 74.168,50.927 77.724,54.483 v1(77.724,70.358) ; U1.8 v1(153.238,74.237)
  Bottom Layer w0.254: v1@77.597,70.104 79.121,71.628 80.494,71.628 81.561,70.561 119.495,70.561 120.378,69.679 148.68,69.679 v1(153.238,74.237)
NetU1_55: U1.55 U6.15 | length 37.3
  Top Layer w0.254: v1(127.406,96.768) 127.406,94.31 129.995,91.721 129.995,85.122 134.38,80.737 U1.55
  Bottom Layer w0.254: U6.15 112.655,96.768 v1(127.406,96.768)
NetU1_56: U1.56 U6.14 | length 37.1
  Top Layer w0.254: v1(116.23,100.101) 123.876,100.101 126.245,97.732 126.245,93.816 129.541,90.519 129.541,84.934 134.238,80.237 U1.56
  Bottom Layer w0.254: U6.14 v1(116.23,100.101)
NetU1_57: U1.57 U6.13 | length 34.1
  Top Layer w0.254: U6.13 116.586,98.668 117.385,99.466 121.945,99.466 123.114,98.298 123.114,94.818 124.943,92.989 125.857,92.989 129.087,89.759 129.087,84.745 134.096,79.737 U1.57
NetU1_58: U1.58 U6.12 | length 27.9
  Top Layer w0.254: U6.12 124.761,92.282 125.857,92.282 126.191,91.948 126.191,87 133.954,79.237 U1.58
NetU1_59: U1.59 U6.11 | length 38
  Top Layer w0.254: U6.11 120.574,99.009 118.237,99.009 117.678,98.45 117.678,94.028 118.872,92.834 122.746,92.834 123.752,91.828 125.584,91.828 125.737,91.675 125.737,85.181 132.182,78.737 U1.59
NetU1_60: U1.60 U6.10 | length 31
  Top Layer w0.254: v1(122.326,91.872) 122.824,91.374 124.968,91.374 125.283,91.059 125.283,84.648 131.694,78.237 U1.60 ; U6.10 125.07,97.053 v1(125.07,94.615)
  Bottom Layer w0.254: v1(122.326,91.872) v1(125.07,94.615)
NetU1_61: U1.61 U6.9 | length 21
  Top Layer w0.254: U1.61 137.478,77.737 138.074,78.334 v1(138.074,78.842)
  Bottom Layer w0.254: U6.9 126.619,90.297 v1(138.074,78.842)
NetU1_62: U1.62 U6.8 | length 26.2
  Top Layer w0.254: U6.8 122.936,89.027 122.936,78.791 123.977,77.749 134.717,77.749 135.23,77.237 U1.62
NetU1_65: U1.65 U6.7 | length 23.6
  Top Layer w0.254: U6.7 v1(121.818,87.605) ; v1(132.639,76.276) 133.102,75.813 134.711,75.813 134.787,75.737 U1.65
  Bottom Layer w0.254: v1(121.818,87.605) 132.639,76.784 v1(132.639,76.276)
NetU1_66: U1.66 U6.6 | length 30.2
  Top Layer w0.254: U6.6 120.701,86.182 120.701,80.086 123.546,77.241 130.885,77.241 131.677,76.45 131.677,75.447 131.811,75.313 134.333,75.313 134.409,75.237 U1.66
NetU1_67: U1.67 U6.5 | length 29.3
  Top Layer w0.254: v1(130.542,75.764) 131.447,74.859 133.757,74.859 133.879,74.737 U1.67
  Bottom Layer w0.254: U6.5 118.11,86.233 120.929,86.233 130.542,76.62 v1(130.542,75.764)
NetU1_68: U1.68 U6.4 | length 38.2
  Top Layer w0.254: v1(127.864,73.203) 129.051,74.39 133.193,74.39 133.347,74.237 U1.68
  Bottom Layer w0.254: U6.4 113.081,88.722 113.081,80.493 118.509,75.064 127.405,75.064 127.864,74.605 v1(127.864,73.203)
NetU1_69: U1.69 U5.15 | length 29.9
  Top Layer w0.254: v1(126.568,73.99) 126.568,72.927 127.254,72.241 129.14,72.241 130.835,73.936 131.855,73.936 132.055,73.737 U1.69
  Bottom Layer w0.254: U5.15 118.176,74.61 125.948,74.61 v1(126.568,73.99)
NetU1_70: U1.70 U5.14 | length 29.3
  Top Layer w0.254: v1(132.893,72.771) 133.359,73.237 U1.70
  Bottom Layer w0.254: U5.14 115.265,82.245 122.428,82.245 123.241,81.432 123.241,79.019 125.628,76.632 128.212,76.632 129.053,75.791 129.053,74.302 129.419,73.936 132.109,73.936 132.893,73.152 v1(132.893,72.771)
NetU1_71: U1.71 U5.13 | length 26.7
  Top Layer w0.254: v1(131.42,72.974) 131.42,72.469 132.08,71.809 133.448,71.809 134.376,72.737 U1.71
  Bottom Layer w0.254: U5.13 116.713,77.719 118.914,75.518 126.111,75.518 127.702,75.518 128.599,74.621 128.599,73.903 129.528,72.974 v1(131.42,72.974)
NetU1_72: U1.72 U5.12 | length 24.1
  Top Layer w0.254: U5.12 119.253,79.629 124.104,74.778 125.328,74.778 125.606,74.5 125.606,71.682 125.933,71.355 134.366,71.355 135.248,72.237 U1.72
NetU1_75: U1.75 U5.11 | length 24
  Top Layer w0.254: v1(120.523,76.632) 123.241,73.914 123.241,72.946 125.45,70.737 U1.75
  Bottom Layer w0.254: v1(120.523,76.632) 121.793,77.902 U5.11
NetU1_76: U1.76 U5.10 | length 64.7
  Top Layer w0.254: v1(137.008,68.326) 138.022,68.326 U1.76
  Bottom Layer w0.254: U5.10 129.507,75.979 129.507,75.363 130.325,74.545 138.687,74.545 139.17,75.028 140.741,75.028 141.659,74.111 141.659,70.51 141.986,70.183 143.583,70.183 144.403,71.004 148.663,71.004 149.288,71.628 149.288,72.586 152.394,75.692 153.695,75.692 154.203,75.184 154.203,70.873 152.012,68.682 137.363,68.682 v1(137.008,68.326)
NetU1_77: U1.77 U5.9 | length 19.7
  Top Layer w0.254: U1.77 138.522,72 v1(139.141,72.619)
  Bottom Layer w0.254: U5.9 126.136,71.73 138.253,71.73 v1(139.141,72.619)
NetU1_78: U1.78 U5.8 | length 21.8
  Top Layer w0.254: U5.8 128.702,66.624 137.574,66.624 139.022,68.072 U1.78
NetU1_79: U1.79 U5.7 | length 25.3
  Top Layer w0.254: U5.7 126.721,66.065 137.658,66.065 139.522,67.93 U1.79
NetU1_80: U1.80 U5.6 | length 27.1
  Top Layer w0.254: U1.80 140.022,71.29 v1(140.106,71.374)
  Bottom Layer w0.254: U5.6 118.237,72.009 123.317,72.009 124.612,70.714 139.446,70.714 v1(140.106,71.374)
NetU1_81: U1.81 U5.5 | length 34.2
  Top Layer w0.254: v1(114.173,67.869) U5.5 ; v1(139.979,66.98) 140.522,67.523 U1.81
  Bottom Layer w0.254: v1(114.173,67.869) 115.062,66.98 v1(139.979,66.98)
NetU1_82: U1.82 U5.4 | length 39.2
  Top Layer w0.254: v1(140.529,73.669) 141.068,73.13 141.068,70.449 141.022,70.403 U1.82
  Bottom Layer w0.254: U5.4 113.64,71.526 119.583,71.526 120.977,70.133 140.716,70.133 141.068,70.485 141.068,73.13 v1(140.529,73.669)
NetU1_98: U1.98 U4.3 | length 103.2
  Top Layer w0.254: U1.98@148.999,68.834 149.022,68.811 149.022,67.906 149.593,67.335 v1(149.593,65.982)
  Bottom Layer w0.254: v1@73.025,44.323 71.501,44.323 68.58,47.244 68.58,55.093 75.082,61.595 119.304,61.595 ; 119.304,61.671 119.304,61.595 ; v1(149.593,65.982) 145.787,62.176 131.506,62.176 130.309,63.373 125.603,63.373 124.003,61.773 119.482,61.773 119.304,61.595
  other v1: 73.279,44.577
NetU5_1: U5.1 U7.2 | length 45.4
  Top Layer w0.254: v1(72.136,91.465) 73.316,92.645 73.316,94.095 73.66,94.439 74.909,94.439 75.24,94.107 U7.2
  Bottom Layer w0.254: v1(72.136,91.465) 85.947,91.465 103.879,73.533 U5.1
NetU6_1: U6.1 U7.6 | length 24.1
  Top Layer w0.254: U7.6 82.423,92.837 v1(82.931,93.345)
  Bottom Layer w0.254: v1(82.931,93.345) 100.838,93.345 U6.1
NetU8_13: U8.13 USART.3 | length 15.3
  Top Layer w0.254: v1(109.093,111.76) 111.112,111.76 U8.13
  Bottom Layer w0.254: v1(109.093,111.76) 109.093,112.432 108.131,113.394 108.131,114.354 111.76,117.983 USART.3
NetU8_14: U8.14 USART.2 | length 13.7
  Top Layer w0.254: v1(109.093,113.792) 109.728,113.157 U8.14
  Bottom Layer w0.254: v1(109.093,113.792) 114.3,118.999 USART.2
OUT1-1: R3.2 U4.1 Vout_1-1.1 | length 35.6
  Top Layer w0.254: Vout_1-1.1 63.779,67.666 63.779,49.759 70.231,43.307 70.358,43.307 U4.1
  Top Layer w0.5: R3.2 67.688,40.637 U4.1@70.358,43.307
OUT1-2: R13.CW R13.W U4.7 Vout_1-2.1 | length 65.5
  Top Layer w0.254: Vout_1-2.1 64.008,103.124 65.151,101.981 65.151,57.404 67.437,55.118 ; R13.CW@66.421,53.848 67.437,52.832 ; R13.W 67.564,55.245 67.437,55.118 ; U4.7 71.628,50.546 70.358,51.816 68.453,51.816 67.437,52.832 ; 67.437,52.832 67.437,55.118
OUT2-1: U5.18 U7.1 Vout_2-1.1 | length 85.8
  Top Layer w0.254: v1(74.295,93.472) 76.987,93.472 77.241,93.726 77.241,95.098 76.962,95.377 U7.1
  Bottom Layer w0.254: Vout_2-1.1 63.195,58.877 63.195,87.325 68.555,92.685 74.524,92.685 74.828,92.38 85.674,92.38 96.901,81.153 U5.18 ; v1(74.295,93.472) 75.384,92.383
OUT2-2: U6.18 U7.7 Vout_2-2.1 | length 77.9
  Top Layer w0.254: Vout_2-2.1 63.322,91.77 63.322,96.85 60.122,100.051 60.122,109.372 60.96,110.211 63.681,110.211 69.65,104.242 69.65,104.213 ; 69.596,104.267 69.65,104.213 ; v1(89.154,98.044) 81.204,98.044 79.426,96.266 79.426,94.945 80.264,94.107 ; 69.65,104.213 74.219,99.644 74.32,99.644 79.858,94.107 80.264,94.107 ; 80.264,94.107 U7.7 80.264,94.107
  Bottom Layer w0.254: v1@89.281,97.917 93.015,97.917 U6.18
PROG1: Prog.1 R7.2 S1.1 U1.90 | length 93.4
  Top Layer w0.254: v1(130.429,97.155) 131.811,95.773 131.811,88.915 138.633,82.093 138.633,80.95 140.666,78.918 141.986,78.918 v1(142.367,78.537) ; v1(130.429,100.838) 131.228,100.838 132.063,101.673 132.483,101.673 140.716,109.906 140.77,109.852 147.063,109.852 152.784,115.573 R7.2 156.464,120.396 S1.1 159.918,120.269 v1(160.223,119.964) ; v1(145.009,73.152) 145.022,73.138 U1.90
  Bottom Layer w0.254: v1(130.429,97.155) v1(130.429,100.838) ; v1(142.367,78.537) 142.367,77.59 145.009,74.948 v1(145.009,73.152) ; v1(160.223,119.964) 172.644,119.964 Prog.1
PROG2: Prog.2 U1.89 | length 66.6
  Top Layer w0.254: U1.89 144.522,71.272 144.043,71.751 144.043,76.454 v1(148.031,80.442) ; v1(163.576,89.945) 168.148,94.517 168.148,115.824 Prog.2
  Bottom Layer w0.254: v1(148.031,80.442) 148.336,80.137 156.591,80.137 163.576,87.122 v1(163.576,89.945)
RXD_XMEGA: R10.2 R11.2 U1.47 | length 40.1
  Top Layer w0.254: R10.2@117.348,105.791 R11.2@117.348,110.363 ; R10.2 123.422,105.664 129.54,99.546 132.236,99.546 134.366,97.416 134.366,90.678 139.522,85.522 U1.47
TXD_XMEGA: U1.48 U8.11 | length 44.9
  Top Layer w0.254: U8.11 111.656,109.347 112.666,108.337 112.666,105.414 113.743,104.337 124.041,104.337 129.286,99.092 132.048,99.092 133.912,97.228 133.912,89.447 137.895,85.464 138.808,85.464 138.999,85.272 138.999,84.36 U1.48
VREF1: C9.1 L3.1 U1.95 | length 71.1
  Top Layer w0.254: v1@98.047,58.928 L3.1 ; U1.95 147.522,66.192 ; C9.1 147.522,63.884 147.522,66.192 ; v1(150.927,64.77) 148.945,64.77 147.522,66.192
  Bottom Layer w0.254: v1@98.044,59.03 98.044,59.342 98.127,59.258 114.493,59.258 114.493,59.248 117.671,59.248 117.671,59.342 118.22,59.89 121.796,59.89 122.453,59.233 123.621,59.233 124.267,59.879 124.267,61.275 125.857,62.865 130.175,62.865 131.318,61.722 147.879,61.722 v1(150.927,64.77)
  other v1: 98.044,58.928
VREF2: L4.2 L5.2 U3.6 U3.7 | length 48.7
  Top Layer w0.254: v1(85.759,67.234) 87.146,65.847 87.146,65.272 86.136,64.262 U3.6 U3.7 ; v1@89.659,78.232 89.792,78.36 93.149,81.598 L4.2@93.215,81.661 ; v1(89.916,78.232) 93.154,81.598 L4.2@93.215,81.661 ; L4.2 L4.2@93.215,81.661 ; L5.2 L4.2@93.215,81.661
  Bottom Layer w0.254: v1(85.759,67.234) 78.816,67.234 76.581,69.469 76.581,70.993 77.978,72.39 84.074,72.39 v1(89.916,78.232)
VREF3: C14.2 L4.1 U5.17 | length 16.8
  Top Layer w0.254: L4.1@96.521,82.295 L4.1 97.282,81.661 v1(97.79,82.169) ; U5.17@105.93,81.153 U5.17 106.553,79.423 106.175,79.045 C14.2
  Bottom Layer w0.254: v1(97.79,82.169) 97.851,82.23 105.476,82.23 U5.17
VREF4: C15.2 L5.1 U6.17 | length 20.7
  Top Layer w0.254: L5.1 96.015,88.392 97.031,89.408 97.917,89.408 103.186,94.677 C15.2@103.248,94.739 ; C15.2 C15.2@103.248,94.739 ; C15.2@103.248,94.739 103.248,95.45 105.715,97.917 U6.17 C15.2@103.248,94.739
VREF_UNBUF: C6.2 R1.2 R2.1 U3.3 | length 28.3
  Top Layer w0.254: U3.3 92.024,64.262 ; v1(92.354,60.604) 92.354,63.932 ; C6.2 R2.1 106.55,59.109 v1(105.054,60.604) 105.048,60.604 105.051,60.607 106.55,62.106 R1.2 ; 92.024,64.262 92.354,63.932 ; 92.024,64.262 92.1,64.262 92.354,64.008 92.354,63.932
  Bottom Layer w0.254: v1(92.354,60.604) v1(105.054,60.604)
XTAL1: C12.1 U1.92 Y1.1 | length 46.9
  Top Layer w0.254: U1.92 146.022,71.32 146.438,71.736 146.438,74.637 v1(147.038,75.237) ; Y1.1 150.117,93.194 C12.1
  Bottom Layer w0.254: v1(147.038,75.237) 146.022,75.237 143.783,77.476 143.783,79.762 143.275,80.27 142.24,80.27 141.732,80.778 141.732,81.232 136.96,86.004 136.96,91.748 138.176,92.964 145.569,92.964 Y1.1
XTAL2: C13.2 U1.91 Y1.2 | length 33.4
  Top Layer w0.254: C13.2 141.475,94.134 142.848,92.761 Y1.2 ; U1.91 145.522,72.212 145.984,72.674 145.984,76.541 149.504,80.061 v1(149.504,81.153)
  Bottom Layer w0.254: Y1.2 142.218,90.175 142.218,86.977 142.748,86.447 144.211,86.447 v1(149.504,81.153)
pads on no net: LCD1.7 LCD1.8 LCD1.9 LCD1.10 LCD1.17 LCD1.18 LCD1.19 LCD1.20 SD.8 U1.1 U1.2 U1.5 U1.6 U1.7 U1.9 U1.10 U1.11 U1.12 U1.15 U1.16 U1.17 U1.18 U1.19 U1.20 U1.21 U1.22 U1.36 U1.85 U1.86 U1.87 U1.88 U1.96 U1.99 U2.2 U2.3 U2.6 U8.7 U8.8 U8.9 U8.10
copper on no net:
  other v2: 53.721,37.719 53.721,123.063
  other v3: 72.39,110.236
  other v4: 93.345,110.236

## Silkscreen, mask and mechanical layers (free items; w line width, h text height)
Top Overlay:
  text "M. M. Zeinali Zadeh" at 137.058,30.302 h4.57
  text "Spectrum Interface - Isfahan Univ. of Tech." at 120.167,26.645 h3.81

## Text inside footprints (layer, text, board x,y; h text height)
Keypad: Top Overlay "2" at 157.988,83.82 h1.27 r90; Top Overlay "1" at 160.528,84.328 h1.27 r90; Top Overlay "7" at 160.528,95.504 h1.27 r90; Top Overlay "8" at 157.988,95.504 h1.27 r90